# Altium PCB BRD131208.pcbdoc
Units mm, origin at the board's own origin, x right, y up, seen from the top; angles counter-clockwise.
Board outline 70 x 90 mm, 2 copper layers (Top Layer, Bottom Layer), stack 1.621 mm thick; 34 components, 34 nets, 128 pads, 5 vias.
Unrouted connection lines stored in the file: 3.
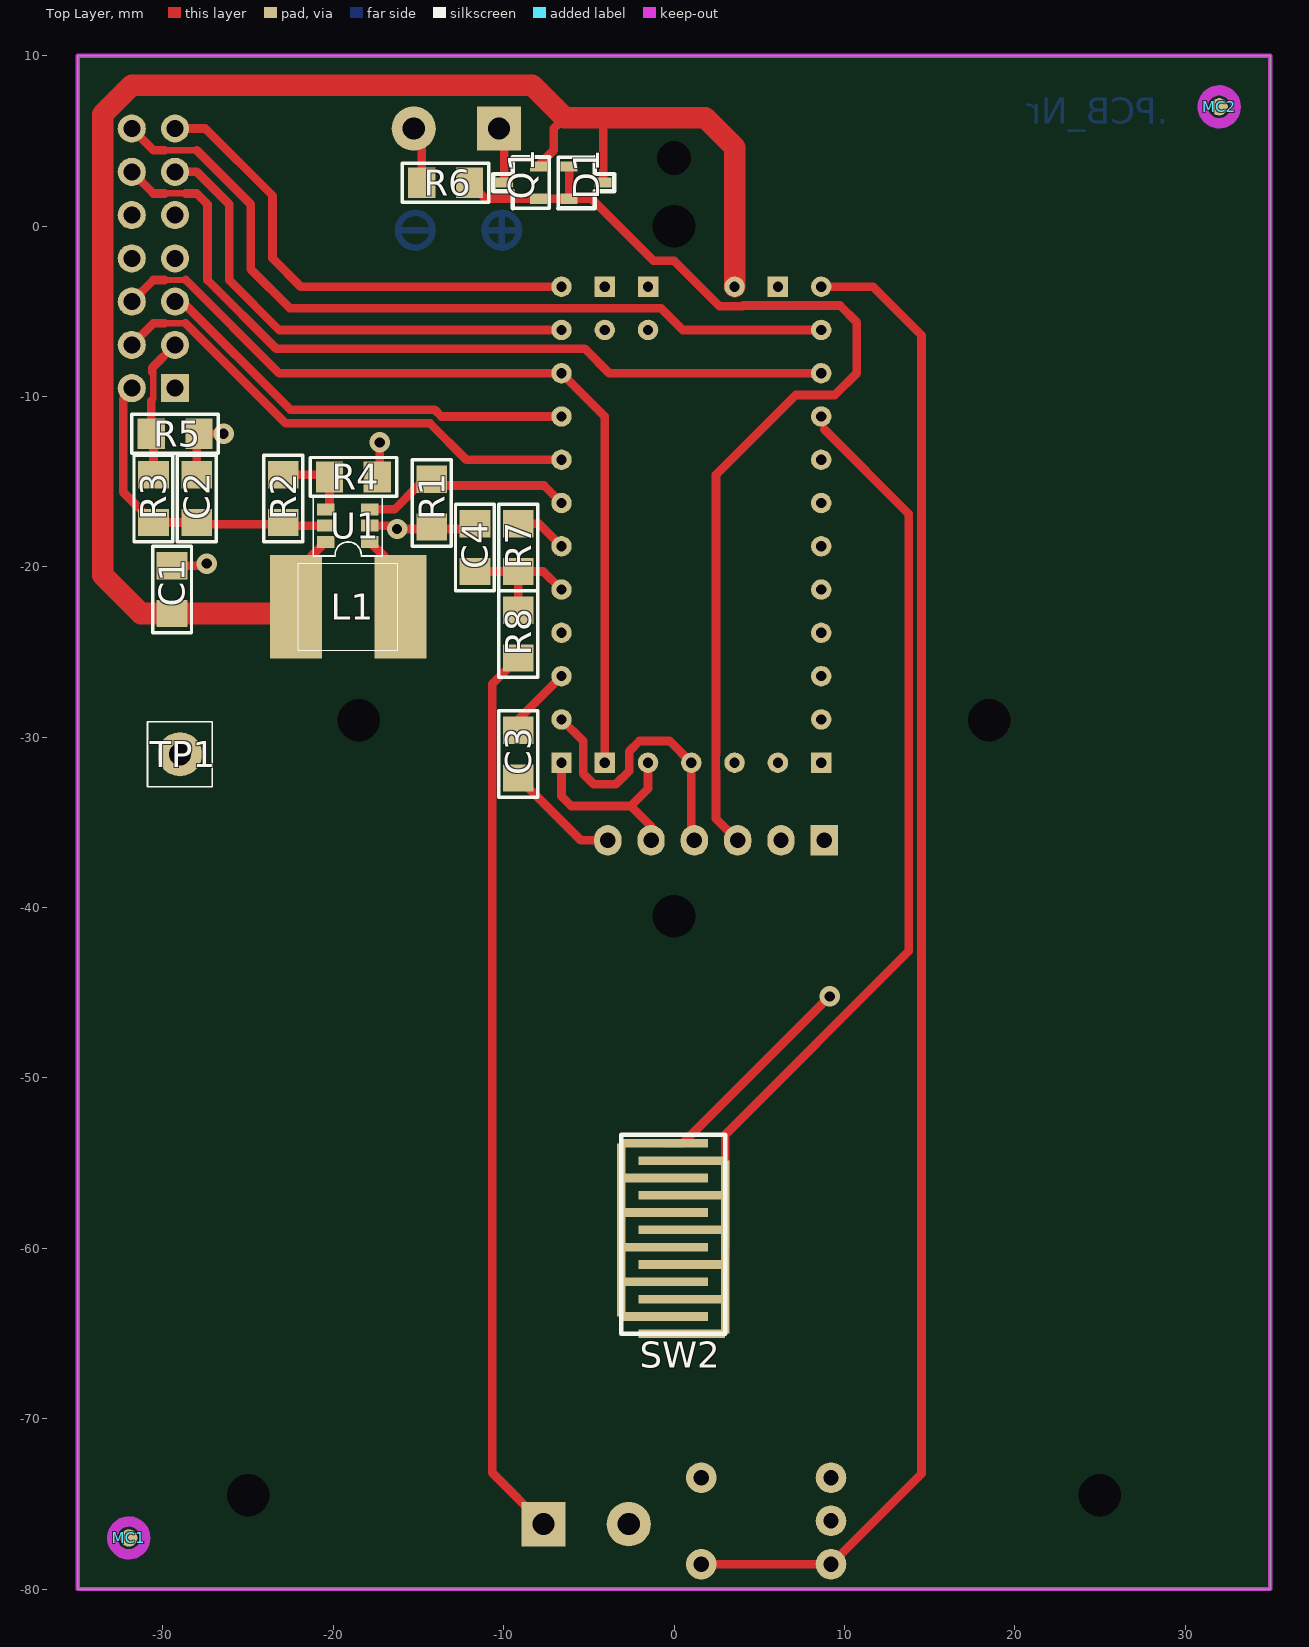
[diagram p0: Top Layer view]
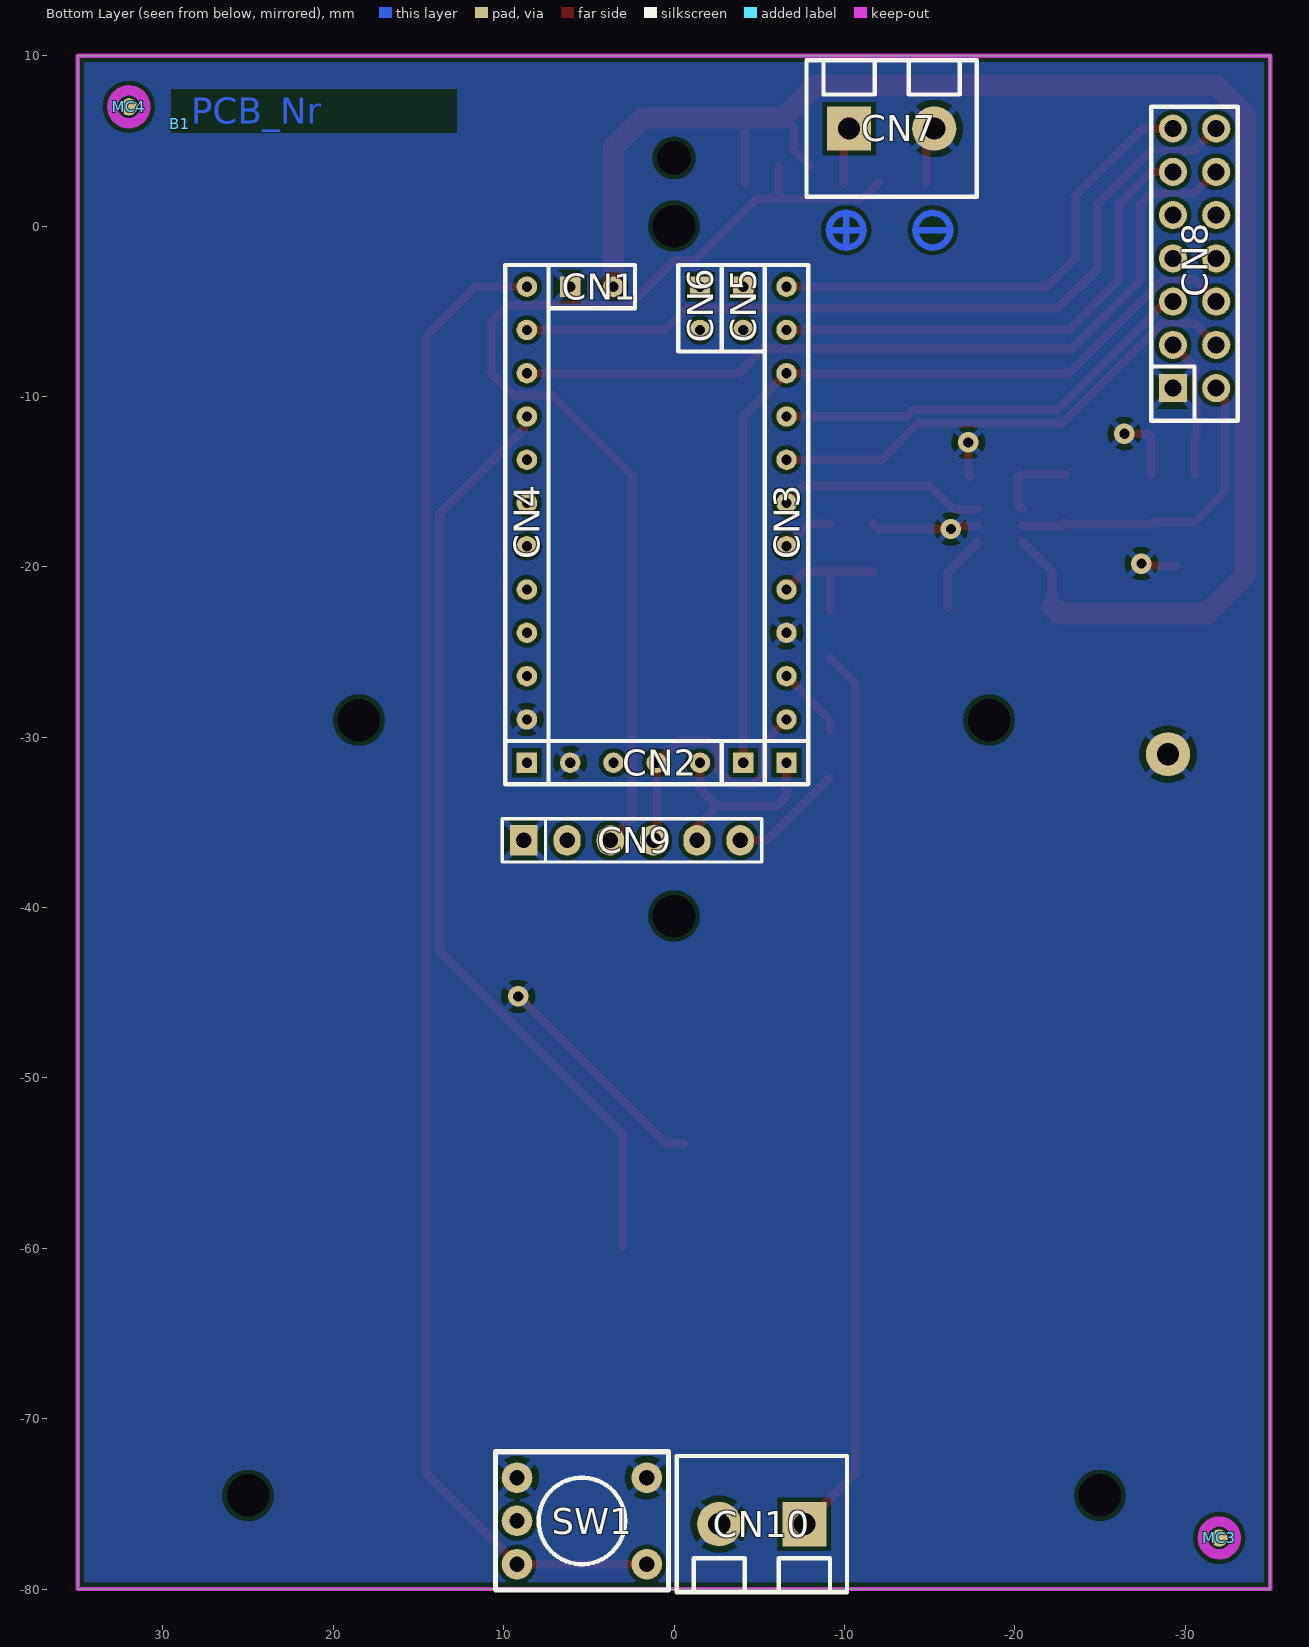
[diagram p1: Bottom Layer view, seen from below]
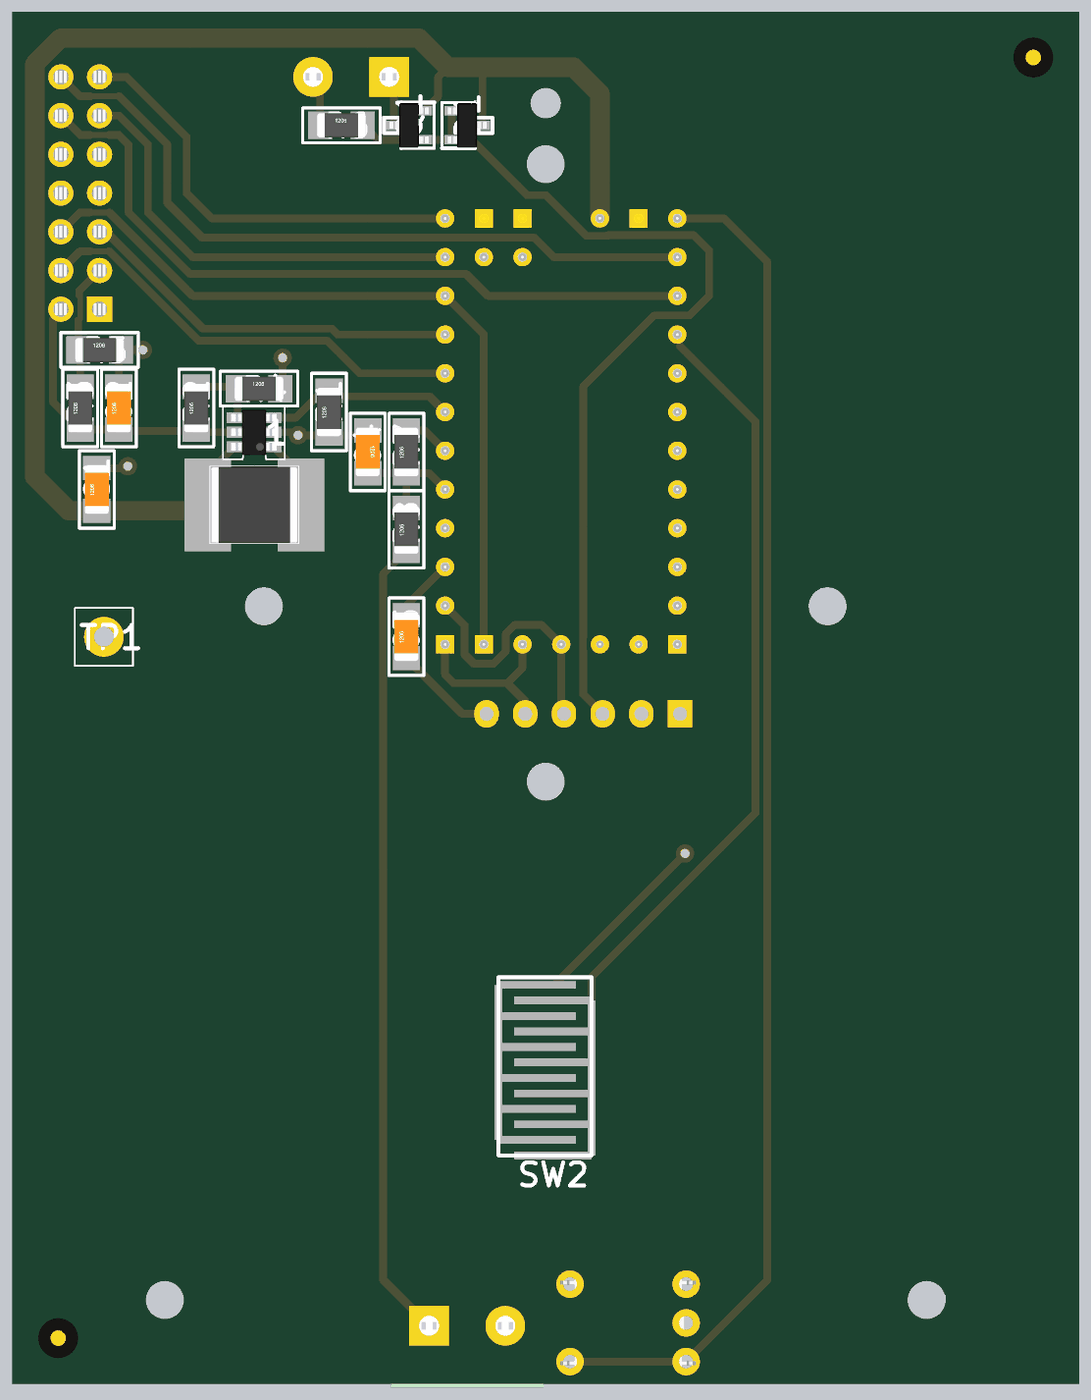
[diagram p2: 3D render of the assembled board from above, using the file's embedded part models]
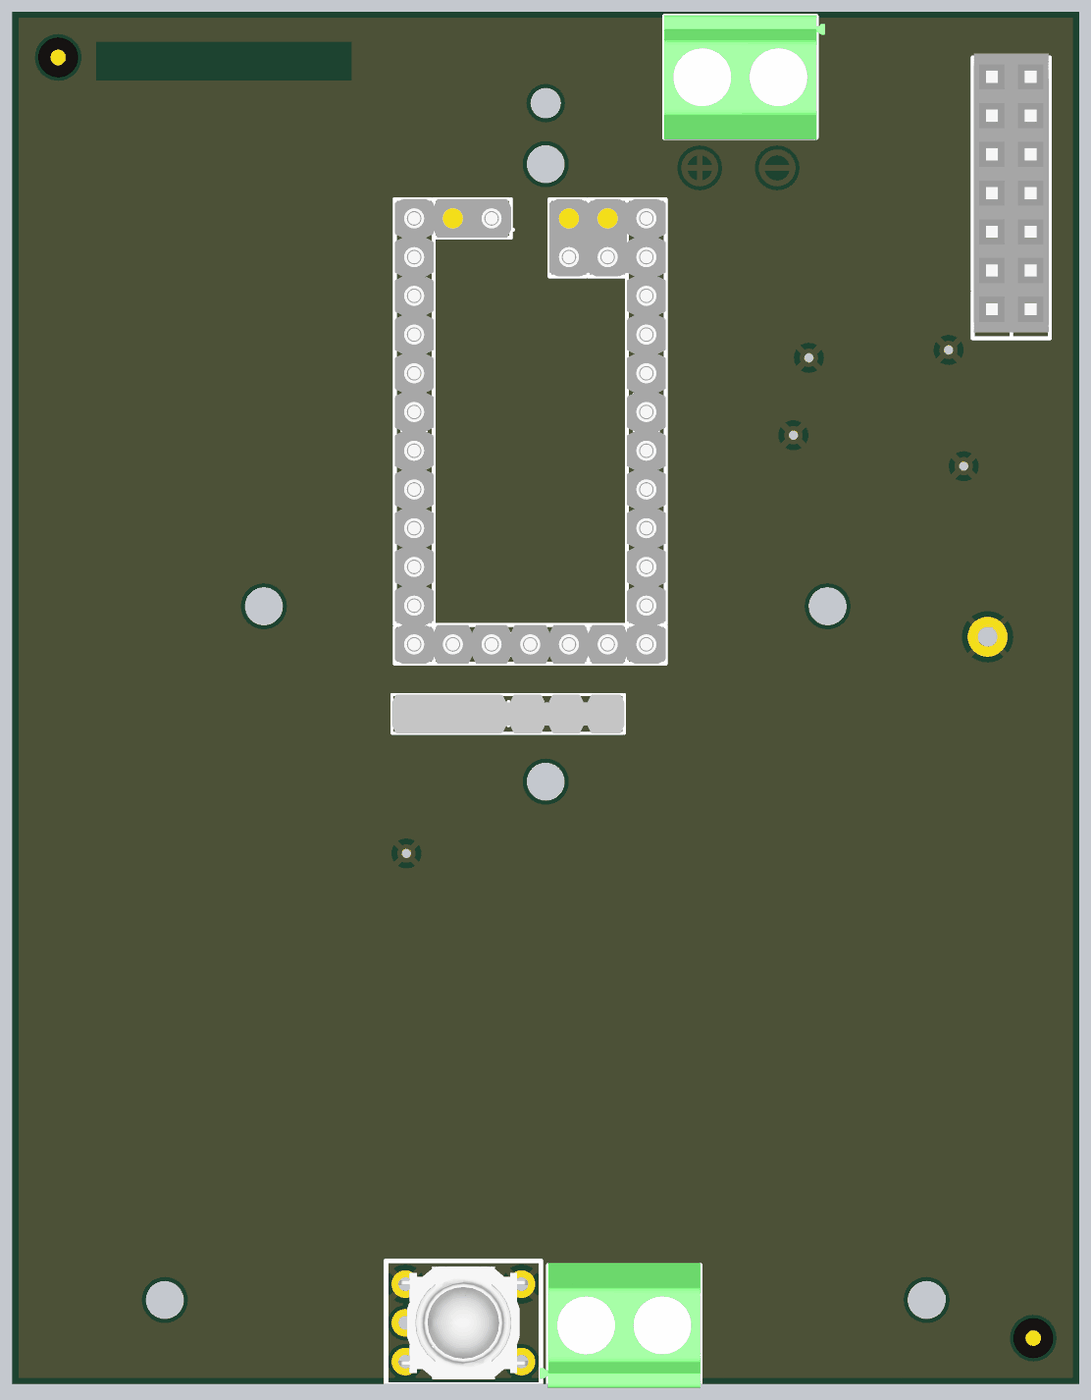
[diagram p3: 3D render of the assembled board from below, using the file's embedded part models]

## Layer stack, top to bottom
Top Layer: signal copper 0.0356
Dielectric: core 1.55, FR-4, Dk 4.8
Bottom Layer: signal copper 0.0356

## Board outline
-35,-80 35,-80 35,10 -35,10

## Design rules (kind name [scope] priority, off if disabled: settings)
Clearance SC_SOT23-6 [HasFootprint('SC_SOT23-6') vs HasFootprint('SC_SOT23-6')] p1: gap=0.229
Clearance [All] p2: gap=0.254
HoleSize [All] p1: absolutevalues=TRUE maxlimit=3.2 minlimit=0.6 maxpercent=80.000 minpercent=20.000
MinimumAnnularRing [All] p1: minimumring=0.254
MinimumSolderMaskSliver SilkscreenOverComponentPads [All] p2: minsoldermaskwidth=0.254
PolygonConnect [All] p1: connectstyle=Relief reliefconductorwidth=0.381 reliefentries=4 polygonreliefangle="45 Angle" airgapwidth=0.381
RoutingVias [All] p1: holewidth=0.6 width=1.2 viastyle="Through Hole" minholewidth=0.6 minwidth=1.2 maxholewidth=0.6 maxwidth=1.2
SolderMaskExpansion [All] p1: expansion=0
Width [All] p1: maxlimit=1.27 minlimit=0.381 preferedwidth=0.508
27 further rules are at their usual default settings.

## Components (designator, comment, footprint, x,y, rotation, side; value= is the part's Value field where it differs from the comment)
B1 "BRD131208/0" MC_BoardNr 29,6 r180 bottom
C1 "YCAM10U" CA_1206 -29.464,-21.336 r90 top
C2 "YCAM10U" CA_1206 -28.015,-15.995 r90 top
C3 "YCAM100N" CA_1206 -9.144,-30.988 r90 top
C4 "YCAM100N" CA_1206 -11.684,-18.872 r270 top
CN1 "TS-102-G-AA" CN_TERMINALSTRIP_2P 6.096,-3.556 r180 bottom
CN2 "TS-105-G-A" CN_TERMINALSTRIP_5P -4.064,-31.496 r0 bottom
CN3 "TS-112-G-A" CN_TERMINALSTRIP_12P -6.604,-31.496 r90 bottom
CN4 "TS-112-G-A" CN_TERMINALSTRIP_12P 8.636,-31.496 r90 bottom
CN5 "TS-102-G-AA" CN_TERMINALSTRIP_2P -4.064,-3.556 r270 bottom
CN6 "TS-102-G-AA" CN_TERMINALSTRIP_2P -1.524,-3.556 r270 bottom
CN7 "CNTRB002" "CN_MKDSN 1,5/2" -12.775,5.725 r180 bottom
CN8 "SSW-107-01-T-D" CN_SCKT2X7 -29.285,-9.515 r90 bottom
CN9 "CNHDR036M3-1/6" CN_HDR1X6 8.815,-36.055 r180 bottom
CN10 "CNTRB002" "CN_MKDSN 1,5/2" -5.155,-76.19 r0 bottom
D1 "YDIOBAT54-1" SC_SOT23 -5.155,2.55 r0 top
L1 "4u7/2.7A" CL_STD_2220 -19.125,-22.345 r0 top
MC1 "Fiducial" MC_FIDUCIAL -32,-77 r0 top
MC2 "Fiducial" MC_FIDUCIAL 32,7 r0 top
MC3 "Fiducial" MC_FIDUCIAL -32,-77 r180 bottom
MC4 "Fiducial" MC_FIDUCIAL 32,7 r180 bottom
Q1 "YTRS2035" SC_SOT23 -8.965,2.55 r180 top
R1 "YRES100K" RE_1206 -14.224,-16.256 r90 top
R2 "470K/1%" RE_1206 -22.935,-15.995 r90 top
R3 "YRES10K" RE_1206 -30.555,-15.995 r90 top
R4 "150K / 1%" RE_1206 -18.82,-14.725 r0 top
R5 "YRES330E" RE_1206 -29.285,-12.185 r0 top
R6 "YRES100K" RE_1206 -13.41,2.55 r0 top
R7 "YRES0E" RE_1206 -9.144,-18.872 r90 top
R8 "YRES330E" RE_1206 -9.144,-23.952 r90 top
SW1 "KSJ0M411" SW_KSJ-M 9.215,-76 r180 bottom
SW2 "PCB" SW_PCB 3,-53.33 r180 top
TP1 "CN001M1" CN_TP_TH_1.3mm -29,-31 r0 top
U1 "MCP1640T-I/CHY" SC_SOT23-6 -17.855,-18.535 r180 top

## Footprints (in the part's own frame and the unit in brackets; to place one, negate y for a bottom-side part, rotate by r counter-clockwise, add the part's x,y. Pads: shape width x height; smd on the part's side, far side on the other; paste and mask are expansions set on the pad)
CA_1206 [mm] "Chip Capacitor; Body 3.2 x 1.6 mm (LxW typ)"
  rect 1.6x1.8 smd: 1(-1.4,0) 2(1.4,0)
  silkscreen extent -2.54,-1.14 2.54,1.14, body extent -1.6,-0.8 1.6,0.8, height 1
CL_STD_2220 [mm]
  rect 3.06x6.1 smd: 1(-3.065,0) 2(3.065,0)
  silkscreen extent -2.92,-2.54 2.92,2.54, body extent -2.85,-2.5 2.85,2.5, height 2.5
CN_HDR1X6 [mm] "Connector; Header; 6 Position"
  rect 1.6x1.8 hole 0.9: 1(0,0)
  oval 1.6x1.8 hole 0.9: 2(2.54,0) 3(5.08,0) 4(7.62,0) 5(10.16,0) 6(12.7,0)
  silkscreen extent -1.27,-1.27 13.97,1.27, body extent -1.27,-1.27 13.97,1.27, height 9.26
"CN_MKDSN 1,5/2" [mm] "Printed screw termination blocks"
  rect 2.6x2.6 hole 1.3: 1(-2.5,0)
  round 2.6 hole 1.3: 2(2.5,0)
  silkscreen extent -5,-4 5,4, body extent -5,-4.1 5.57,4.05, height 10
CN_SCKT2X7 [mm] "Samtec SSW-107-01-T-D"
  rect 1.65x1.65 hole 1: 1(0,0)
  round 1.65 hole 1: 2(0,-2.54) 3(2.54,0) 4(2.54,-2.54) 5(5.08,0) 6(5.08,-2.54) 7(7.62,0) 8(7.62,-2.54) 9(10.16,0) 10(10.16,-2.54) 11(12.7,0) 12(12.7,-2.54) 13(15.24,0) 14(15.24,-2.54)
  silkscreen extent -1.91,-3.81 16.51,1.27, body extent -1.52,-3.75 16.76,1.21, height 8.51
CN_TERMINALSTRIP_2P [mm] "TS-102-G-A"
  rect 1.2x1.2 hole 0.6: 1(0,0)
  round 1.2 hole 0.6: 2(2.54,0)
  silkscreen extent -1.27,-1.27 3.81,1.27, body extent -1.27,-1.27 3.81,1.27, height 4.44
CN_TERMINALSTRIP_5P [mm] "TS-105-G-A / Samtec SS-105"
  rect 1.2x1.2 hole 0.6: 1(0,0)
  round 1.2 hole 0.6: 2(2.54,0) 3(5.08,0) 4(7.62,0) 5(10.16,0)
  silkscreen extent -1.27,-1.27 11.43,1.27, body extent -1.27,-1.27 11.43,1.27, height 4.44
CN_TERMINALSTRIP_12P [mm] "TS-112-G-A"
  rect 1.2x1.2 hole 0.6: 1(0,0)
  round 1.2 hole 0.6: 2(2.54,0) 3(5.08,0) 4(7.62,0) 5(10.16,0) 6(12.7,0) 7(15.24,0) 8(17.78,0) 9(20.32,0) 10(22.86,0) 11(25.4,0) 12(27.94,0)
  silkscreen extent -1.27,-1.27 29.21,1.27, body extent -1.27,-1.27 29.21,1.27, height 4.44
CN_TP_TH_1.3mm [mm]
  round 2.6 hole 1.3: 1(0,0)
  silkscreen extent -1.91,-1.91 1.91,1.91, body extent -2.98,-2.99 3,2.99, height 1
MC_BoardNr [mm] "Board number"
MC_FIDUCIAL [mil] "Fiducial"
  round 40 smd paste-3937.01 mask+31.5: 0(0,0)
  Top Layer keep-out circle w24: c0,0 r38
RE_1206 [mm] "Chip Resistor; Body 3.2 x 1.6 mm (LxW typ)"
  rect 1.6x1.8 smd: 1(-1.4,0) 2(1.4,0)
  silkscreen extent -2.54,-1.14 2.54,1.14, body extent -1.6,-0.8 1.6,0.8, height 1
SC_SOT23 [mm] "SOT23, 3-Leads, Body 2.9x1.3mm, Pitch 0.95mm, Lead Span 2.3mm, IPC High Density"
  rect 1x0.6 smd: 1(-1,0.95) 2(-1,-0.95) 3(1,0)
  silkscreen extent -1.65,-1.5 1.65,1.5, body extent -1.27,-1.46 1.27,1.46, height 0.99
SC_SOT23-6 [mil] "SC_SOT23-6"
  rect 40x28 smd: 1(0,0) 2(0,-37.5) 3(0,-75) 4(102,-75) 5(102,-37.5) 6(102,0)
  silkscreen extent -29,-108 131,33, body extent -8,-97 110,22, height 51
SW_KSJ-M [mm] "C&K SPST switch"
  round 1.8 hole 0.9: 0(0,0) 1(0,-2.54) 1(7.62,-2.54) 2(0,2.54) 2(7.62,2.54)
  silkscreen extent -1.27,-4.06 8.89,4.06, body extent -0.65,-3.7 8.27,3.7, height 6.63
SW_PCB [mil]
  rect 20x400 smd: 1(0,260) 2(240,220)
  rect 200x20 smd: 1(100,460) 1(100,300) 1(100,380) 1(100,220) 1(100,60) 1(100,140) 2(140,420) 2(140,180) 2(140,260) 2(140,340) 2(140,20) 2(140,100)
  silkscreen extent 0,0 240,460

## Part data
B1: library part BARE_PCB
CN3 CN4 CN9: "*"
D1: "Dual Schottky Barrier Diode Common Cathode"
L1: library part LQH55DN4R7M03L
R1 R3 R5 R6 R7 R8: "Resistor"
R2: library part CRCW1206470KFKEA, "Resistor"
R4: library part RC1206FR-07150KL, "Resistor"
SW2: library part PCB_SWITCH

## Free pads (board coordinates)
  round 0 hole 2 unplated mask+1: 0(0,4)
  round 0 hole 2.5 unplated mask+1.25: 1(0,0) 2(-18.5,-29) 3(18.5,-29) 4(0,-40.5) 5(-25,-74.5) 6(25,-74.5)

## Via types
v1: diameter 1.2, hole 0.6, Top Layer to Bottom Layer, tented both sides, 5 vias

## Nets (pads, with @x,y where several pads share a name; then routed paths per layer and width w, separated by ;. In a path a pad name is that pad's centre, name@x,y a point inside that pad or via, vN(x,y) a via of type N, cw(c..) or ccw(c..) an arc to the next point about the centre after c; other vN are vias at no path point)
+5V: C1.1 CN1.2 CN2.4 CN4.4 D1.3 L1.1 Q1.2 U1.6 | length 98.8
  Top Layer w0.508: L1.1 -22.19,-20.279 U1.6 ; Q1.2 -7.965,3.55 -7.06,4.455 -7.06,5.725 -6.425,6.36 ; D1.3 -4.155,6.36
  Top Layer w1.27: L1.1 -22.581,-22.736 C1.1 -31.304,-22.736 -33.539,-20.501 -33.539,6.551 -31.825,8.265 -8.33,8.265 -6.425,6.36 1.83,6.36 3.556,4.634 CN1.2
+9V: CN4.1
AIN0: CN4.8
AIN1: CN4.7
AIN2: CN4.6
AIN3: CN4.5
AIN4: CN5.1
AIN5: CN6.1
AIN6: CN5.2
AIN7: CN6.2
DIO2: C4.2 CN3.5 R7.1 R8.2 | length 7.8
  Top Layer w0.508: C4.2 R7.1 ; R8.2 R7.1 ; CN3.5 -7.668,-20.272 R7.1
DIO3: CN3.6 R7.2 | length 3.1
  Top Layer w0.508: R7.2 -7.928,-17.472 CN3.6
DIO4: CN3.7 R1.2 U1.3 | length 12.3
  Top Layer w0.508: U1.3 -16.41,-16.63 -15.01,-15.23 -7.63,-15.23 CN3.7
DIO5: CN3.8 CN8.4 | length 29.1
  Top Layer w0.381: -29.9,-5.705 -28.67,-5.705
  Top Layer w0.508: CN8.4 -30.555,-5.705 -29.9,-5.705 ; -28.67,-5.705 -22.793,-11.582 -14.326,-11.582 -12.192,-13.716 CN3.8
DIO6: CN3.9 CN8.5 | length 25.5
  Top Layer w0.508: CN8.5 -28.862,-4.435 -22.512,-10.785 -14.037,-10.785 -13.646,-11.176 CN3.9
DIO7: CN2.1 CN3.10 CN8.6 | length 51.9
  Top Layer w0.381: -29.9,-3.165 -28.65,-3.165
  Top Layer w0.508: CN8.6 -30.555,-3.165 -29.9,-3.165 ; -28.65,-3.165 -23.179,-8.636 CN3.10 -4.064,-11.176 CN2.1
DIO8: CN3.11 CN8.11 | length 29.1
  Top Layer w0.508: CN8.11 -28.015,3.185 -26.11,1.28 -26.11,-3.165 -23.179,-6.096 CN3.11
DIO9: CN3.12 CN8.13 | length 28.7
  Top Layer w0.508: CN8.13 -27.507,5.725 -23.57,1.788 -23.57,-1.895 -21.909,-3.556 CN3.12
DIO10: CN4.12 SW1.1 | length 89
  Top Layer w0.508: SW1.1@1.595,-78.54 9.215,-78.54 14.53,-73.225 14.53,-6.402 11.684,-3.556 CN4.12
DIO11: CN4.11 CN8.14 | length 47.6
  Top Layer w0.381: -29.9,4.455 -28.015,4.455
  Top Layer w0.508: CN8.14 -30.555,4.455 -29.9,4.455 ; -28.015,4.455 -24.84,1.28 -24.84,-2.53 -22.544,-4.826 -0.762,-4.826 0.508,-6.096 CN4.11
DIO12: CN4.10 CN8.12 | length 48
  Top Layer w0.381: -29.9,1.915 -28.65,1.915
  Top Layer w0.508: CN8.12 -30.555,1.915 -29.9,1.915 ; -28.65,1.915 -28.015,1.915 -27.38,1.28 -27.38,-3.165 -23.341,-7.204 -5.229,-7.204 -3.797,-8.636 CN4.10
DIO13: CN4.9 SW2.1 | length 54.5
  Top Layer w0.508: SW2.1@3,-59.934 3,-53.33 13.768,-42.562 13.768,-16.878 8.815,-11.925
GND: C1.2 C2.2 C4.1 CN1.1 CN2.5 CN3.4 CN4.2 CN7.2 CN8.1 CN9.1 CN10.2 R1.1 R4.2 R5.2 R6.1 SW1.2 SW2.2 TP1.1 U1.2 | length 31.1
  Top Layer w0.508: C1.2 -27.556,-19.936 v1(-27.432,-19.812) ; C2.2 -28.015,-12.315 R5.2 ; R5.2 v1(-26.44,-12.185) ; U1.2 -16.454,-17.582 v1(-16.256,-17.78) -11.992,-17.78 C4.1 ; R4.2 -17.272,-14.577 v1(-17.272,-12.7) ; CN7.2 -14.81,5.26 R6.1 ; SW2.2@-0.556,-53.838 0.518,-53.838 v1(9.144,-45.212)
NetC2_1: C2.1 CN8.2 R2.1 R3.1 U1.5 | length 19
  Top Layer w0.508: CN8.2@-31.635,-9.46 -32.333,-10.158 -32.333,-15.617 R3.1 C2.1 ; C2.1@-28.015,-17.494 R2.1@-23.075,-17.494 ; R2.1 -22.748,-17.582 U1.5
NetC3_1: C3.1 CN9.6 | length 6.8
  Top Layer w0.508: C3.1 -5.477,-36.055 CN9.6
NetCN7_1: CN7.1 Q1.3 | length 3.3
  Top Layer w0.508: CN7.1 -9.965,5.415 Q1.3
NetCN8_3: CN8.3 R3.2 R5.1 | length 8.3
  Top Layer w0.381: -30.685,-10.26 -30.556,-10.131 -30.556,-8.635 -30.618,-8.572
  Top Layer w0.508: -30.685,-10.26 R5.1 -30.555,-12.315 R3.2 ; -30.618,-8.572 -30.618,-8.308 CN8.3
NetCN9_3: CN9.3 D1.1 D1.2 Q1.1 R6.2 | length 63.8
  Top Layer w0.508: R6.2 -11.06,1.6 Q1.1 D1.2 ; D1.1 D1.2 ; CN9.3 2.465,-34.785 2.465,-31.989 2.448,-31.972 2.448,-31.037 2.465,-31.02 2.465,-14.595 7.144,-9.916 9.44,-9.916 10.72,-8.636 10.72,-5.64 9.744,-4.664 4.064,-4.664 4.029,-4.699 2.667,-4.699 0,-2.032 -1.208,-2.032 -4.84,1.6 D1.2
NetCN10_1: CN10.1 R8.1 | length 52.7
  Top Layer w0.508: R8.1 -10.668,-26.876 -10.668,-73.177 CN10.1
NetL1_2: L1.2 U1.1 | length 4.6
  Top Layer w0.508: U1.1 -16.06,-20.33 L1.2
NetR2_2: R2.2 R4.1 U1.4 | length 4.8
  Top Layer w0.508: R2.2 -20.35,-14.595 R4.1 -20.22,-16.404 U1.4
RST: C3.2 CN3.3 CN4.3 | length 4.2
  Top Layer w0.508: C3.2 -9.144,-28.956 CN3.3
RX: CN2.3 CN3.2 CN9.4 | length 17.2
  Top Layer w0.508: CN3.2 -5.334,-30.226 -5.334,-32.144 -4.712,-32.766 -3.416,-32.766 -2.632,-31.982 -2.632,-30.826 -2.032,-30.226 -0.254,-30.226 CN2.3 1.016,-35.876 CN9.4
TX: CN2.2 CN3.1 CN9.5 | length 10.9
  Top Layer w0.508: CN3.1 -6.604,-33.466 -6.034,-34.036 -2.54,-34.036 ; CN2.2 -1.524,-33.02 -2.54,-34.036 ; CN9.5@-1.345,-35.231 -2.54,-34.036
pads on no net: CN8.7 CN8.8 CN8.9 CN8.10 CN9.2 MC1.0 MC2.0 MC3.0 MC4.0 SW1.0
copper on no net: | length 18.9
  Bottom Layer w0.381: -16.204,-0.244 -14.172,-0.244 ; -11.124,-0.244 -9.092,-0.244 ; -10.108,-1.26 -10.108,0.772 ; -14.172,-0.244 ccw(c-15.188,-0.244) -14.172,-0.244 ; -9.092,-0.244 ccw(c-10.108,-0.244) -9.092,-0.244

## Polygon pours and split planes (outlines as drawn)
GND on Bottom Layer "Bottom Layer-GND" (solid, remove dead copper, pour order 2): -35,-80 35,-80 35,10 -35,10

## Keep-outs
Keep-Out Layer:
  the board outline again, w0.254

## Silkscreen, mask and mechanical layers (free items; w line width, h text height)
Mechanical 1:
  circle w0.254: c0,0 r2.25
  circle w0.254: c-18.5,-29 r2.25
  circle w0.254: c18.5,-29 r2.25
  circle w0.254: c0,-40.5 r2.25
  circle w0.254: c-25,-74.5 r2.25
  circle w0.254: c25,-74.5 r2.25
  lines w0.254: -27.5,-27.5 27.5,-27.5 ; -27.5,-27 -27.5,-26.5 ; -27.5,-24 -24.5,-24 -24.5,-1.5 ; -27,-28 -27,-23.5 ; -25,-24 -25,-1.5 25,-1.5 25,-24 ; -25,-2 25,-2 ; -24.5,-23.5 -27.5,-23.5 -27.5,-28 27.5,-28 27.5,-23.5 24.5,-23.5 ; -21.96,-23 -21.96,-22.5 ; 24.5,-23 24.5,-22.5 ; 24.5,-1.5 24.5,-24 27.5,-24 ; 27,-28 27,-23.5 ; 27.5,-27 27.5,-26.5 ; -30,-72 30,-72 30,-46 -30,-46 -30,-72 ; -3,-65 -3,-53 3,-53 3,-65 -3,-65
Mechanical 4:
  lines w0.127: -89.92,-123 -95,-123 ; -59.44,17.97 -89.92,17.97 ; -46.74,-123 -46.74,-117.92 ; -46.74,17.97 -46.74,23.05 ; -21.34,-110.275 92.96,-110.275 ; -21.34,-102.655 92.96,-102.655 ; -21.34,-95.035 16.76,-95.035 ; 1.52,-123 1.52,-117.92 ; 1.52,17.97 1.52,23.05 ; 16.76,-117.895 16.76,-102.655 16.76,-87.415 ; 49.78,-123 49.78,-117.92 ; 49.78,17.97 49.78,23.05 ; 70.1,-117.895 70.1,-102.655 ; 92.96,-123 98.04,-123 ; -95,-123 98.04,-123 ; -95,-123 -95,23.05 98.04,23.05 98.04,-123 ; -89.92,17.97 92.96,17.97 92.96,-117.92 -89.92,-117.92 -89.92,17.97 ; -21.34,-117.895 -21.34,-87.415 ; -21.34,-117.895 92.96,-117.895 92.96,-87.415 16.76,-87.415 ; -21.34,-117.895 -56.9,-117.895 -56.9,-87.415 -21.34,-87.415 ; -21.34,-87.415 16.76,-87.415 ; -95,-49.975 -89.92,-49.975 -95,-49.975 ; 92.96,-49.975 98.04,-49.975 92.96,-49.975
  text "A" at -68.559,19.875 h1.78 r90
  text "B" at -20.502,19.875 h1.78 r90
  text "C" at 28.012,19.875 h1.78 r90
  text "D" at 76.018,19.875 h1.78 r90
  text "2" at -91.571,-14.11 h1.78 r90
  text "2" at 96.389,-14.11 h1.78 r90
  text "1" at -91.571,-86.754 h1.78 r90
  text "1" at 96.389,-86.754 h1.78 r90
  text "ENGINEER:" at -20.07,-89.955 h1.14
  text "TITLE:" at 18.03,-89.955 h1.14
  text ".ProjectNaam" at 24.38,-96.762 h2.5
  text "PCB DESIGNER:" at -20.07,-97.448 h1.14
  text ".DrawnByX" at -7.243,-100.419 h2.5
  text "DATE:" at -20.07,-105.195 h1.14
  text "PART NO.:" at 18.03,-105.195 h1.14
  text "REV:" at 71.37,-105.195 h1.14
  text ".VariantName" at 26.92,-108.039 h2
  text ".PRINT_DATE" at -18.8,-108.243 h1.78
  text ".RevisionNR" at 71.421,-108.573 h2.5
  text "FILE NAME:" at -20.07,-112.815 h1.14
  text "DWG NO:" at 18.03,-112.815 h1.14
  text "SCALE:" at 71.37,-112.815 h1.14
  text ".PCB_Nr" at 26.996,-115.253 h2.5
  text ".PCB_FILE_NAME_NO_PATH" at -18.8,-115.863 h1.78
  text "A" at -68.559,-121.095 h1.78 r90
  text "B" at -20.502,-121.095 h1.78 r90
  text "C" at 28.012,-121.095 h1.78 r90
  text "D" at 76.018,-121.095 h1.78 r90
Mechanical 5:
  lines w0.127: -89.92,-123 -95,-123 ; -89.92,-110.275 24.38,-110.275 ; -89.92,-102.655 24.38,-102.655 ; -67.06,-117.895 -67.06,-102.655 ; -46.74,-123 -46.74,-117.92 ; -46.74,17.97 -46.74,23.05 ; -13.72,-117.895 -13.72,-102.655 -13.72,-87.415 ; -13.72,-95.035 24.38,-95.035 ; 1.52,-123 1.52,-117.92 ; 1.52,17.97 1.52,23.05 ; 49.78,-123 49.78,-117.92 ; 49.78,17.97 49.78,23.05 ; 62.48,17.97 92.96,17.97 ; 92.96,-123 98.04,-123 ; -95,-123 98.04,-123 ; -95,-123 -95,23.05 98.04,23.05 98.04,-123 ; -13.72,-87.415 -89.92,-87.415 -89.92,-117.895 24.38,-117.895 ; -13.72,-87.415 24.38,-87.415 ; 24.38,-117.895 24.38,-87.415 ; 24.38,-117.895 59.94,-117.895 59.94,-87.415 24.38,-87.415 ; 92.96,17.97 -89.92,17.97 -89.92,-117.92 92.96,-117.92 92.96,17.97 ; -95,-49.975 -89.92,-49.975 -95,-49.975 ; 92.96,-49.975 98.04,-49.975 92.96,-49.975
  text "D" at -72.978,19.875 h1.78 r270
  text "C" at -24.972,19.875 h1.78 r270
  text "B" at 23.542,19.875 h1.78 r270
  text "A" at 71.599,19.875 h1.78 r270
  text "2" at -93.349,-14.11 h1.78 r270
  text "2" at 94.611,-14.11 h1.78 r270
  text "1" at -93.349,-86.754 h1.78 r270
  text "1" at 94.611,-86.754 h1.78 r270
  text "TITLE:" at -14.99,-89.955 h1.14
  text "ENGINEER:" at 23.11,-89.955 h1.14
  text ".ProjectNaam" at -20.451,-96.559 h2.5
  text "PCB DESIGNER:" at 23.11,-97.448 h1.14
  text ".DrawnByX" at 10.664,-100.496 h2.5
  text "REV:" at -68.33,-105.195 h1.14
  text "PART NO.:" at -14.99,-105.195 h1.14
  text "DATE:" at 23.11,-105.195 h1.14
  text ".PRINT_DATE" at 21.84,-108.243 h1.78
  text ".VariantName" at -25.048,-108.395 h2
  text ".RevisionNR" at -67.517,-109.64 h2.5
  text "SCALE:" at -68.33,-112.815 h1.14
  text "DWG NO:" at -14.99,-112.815 h1.14
  text "FILE NAME:" at 23.11,-112.815 h1.14
  text ".PCB_FILE_NAME_NO_PATH" at 21.84,-115.863 h1.78
  text ".PCB_Nr" at -22.737,-116.117 h2.5
  text "D" at -72.978,-121.095 h1.78 r270
  text "C" at -24.972,-121.095 h1.78 r270
  text "B" at 23.542,-121.095 h1.78 r270
  text "A" at 71.599,-121.095 h1.78 r270
Mechanical 8:
  the board outline again, w0.254
Drill Drawing:
  lines w0.305: -87.5,-83 -87.5,-85.5 -85,-85.5 ; -87.5,14.5 -87.5,17 -85,17 ; 90,-85.5 92.5,-85.5 92.5,-83 ; 90,17 92.5,17 92.5,14.5
  text ".legend" at 40.132,-78.74 h1.52

## Dimensions
-35,10 to -35,-80 on Mechanical 2
-35,10 to 35,10 on Mechanical 2